# EAGLE board EL1 (EAGLE 9.6.2)
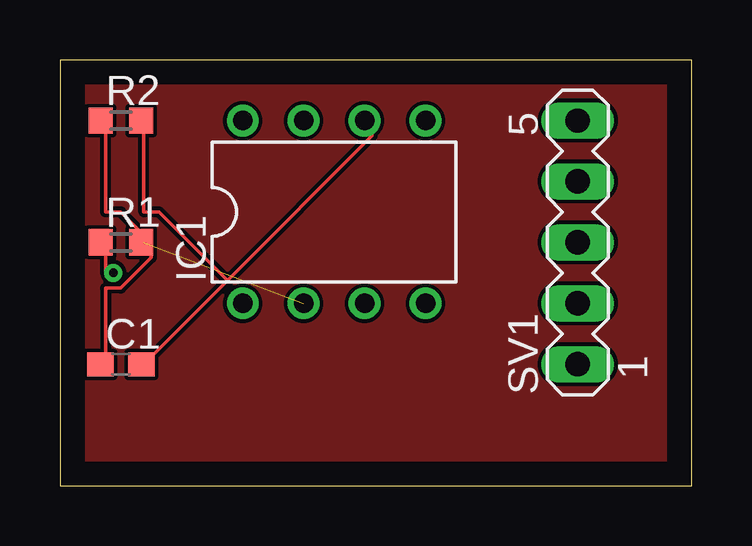
[diagram p0: board, top side]
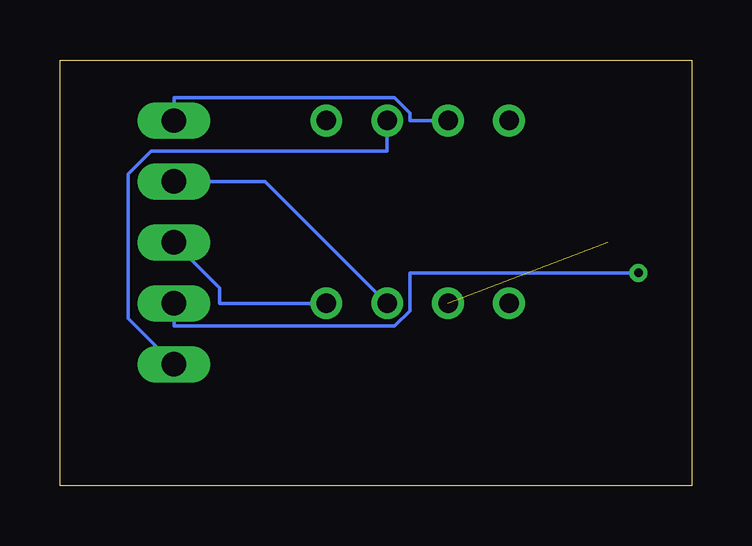
[diagram p1: board, bottom side, seen from below]

Size 26.34 x 17.77 mm. Coordinates in mm from the lower left corner, seen from the top.
Outline: 0,0 26.34,0 26.34,17.77 0,17.77 0,0
Copper layers (1*16): Top 0.035mm / dielectric 1.5mm / Bottom 0.035mm
Design rules "default": minimum track width 6mil, minimum drill 0.35mm, track to track 6mil, track to pad 6mil, pad to pad 6mil, via to via 6mil, smd to smd 6mil, copper to edge 40mil, drill to drill 6mil, minimum pad ring 10mil, minimum via ring 8mil, stop-mask expansion 4mil, vias tented up to drill 0mil, thermal gap 10mil

## Footprints (pad centres in the part's own frame; a part is rotated, then mirrored left to right if it is on the bottom)
C0603 = smd 1.1 x 1: 1 -0.85,0; 2 0.85,0
DIL08 = drill 0.813 pad 1.27: 1 -3.81,-3.81; 2 -1.27,-3.81; 3 1.27,-3.81; 4 3.81,-3.81; 5 3.81,3.81; 6 1.27,3.81; 7 -1.27,3.81; 8 -3.81,3.81
R0603 = smd 1 x 1.1: 1 -0.85,0; 2 0.85,0
MA05-1 = drill 1.016 long: 1 -5.08,0; 2 -2.54,0; 3 0,0; 4 2.54,0; 5 5.08,0

## Placement (x,y rotation side)
C1  2uF  [C0603]  2.54,5.08 0 top
IC1  LM741P  [DIL08]  11.43,11.43 0 top
R1  1k  [R0603]  2.54,10.16 0 top
R2  10k  [R0603]  2.54,15.24 0 top
SV1  [MA05-1]  21.59,10.16 90 top

## Library data of the parts
C1 = rcl; SPICEPREFIX: C
IC1 = linear
R1 R2 = rcl; SPICEPREFIX: R
SV1 = con-lstb; OC_FARNELL: unknown; OC_NEWARK: unknown

## Nets
+15V: IC1.7 SV1.5
-15V: IC1.4 SV1.3
GND: IC1.3 SV1.4
N$1: C1.1 IC1.2 R1.2 R2.1
N$2: C1.2 IC1.6 R2.2 SV1.1
N$3: R1.1 SV1.2

## Tracks (layer width: path | path; a pad name or v marks a point on that pad's centre or on a via)
+15V
  Bottom 0.152: IC1.7 11.75,15.24 11.75,15.56 12.38,16.19 21.59,16.19 SV1.5
-15V
  Bottom 0.152: IC1.4 19.68,7.62 19.68,8.26 SV1.3
GND
  Bottom 0.152: IC1.3 17.78,12.7 SV1.4
N$1  (1 unrouted)
  Top 0.152: 3.81,10.16 3.81,9.52 2.54,8.26 1.91,8.26 1.91,5.08 C1.1 | 3.81,10.16 R1.2 3.49,10.16 | 3.81,10.16 2.54,11.43 1.91,11.43 1.91,15.24 R2.1
N$2
  Top 0.152: 6.99,8.57 13.02,14.6 13.02,15.24 IC1.6 | 6.99,8.57 3.49,5.08 C1.2 | 6.99,8.57 4.13,11.43 3.49,11.43 3.49,15.24 R2.2
  Bottom 0.152: SV1.1 23.5,6.99 23.5,13.02 22.54,13.97 12.7,13.97 IC1.6
N$3  (via drill 0.35)
  Top 0.152: v2.22,8.89 1.91,8.89 1.91,10.16 R1.1
  Bottom 0.152: v2.22,8.89 11.75,8.89 11.75,7.3 12.38,6.67 21.59,6.67 SV1.2
N$4
  pour Top: 0,17.78 26.67,17.78 26.67,0 0,0